# Altium PCB PCB2.PcbDoc
Units mil, origin at the board's own origin, x right, y up, seen from the top; angles counter-clockwise.
Board outline 6000 x 4000 mil, 2 copper layers (Top Layer, Bottom Layer), stack 12.8 mil thick; 9 components, 15 nets, 60 pads, 0 vias.
Unrouted connection lines stored in the file: 1.
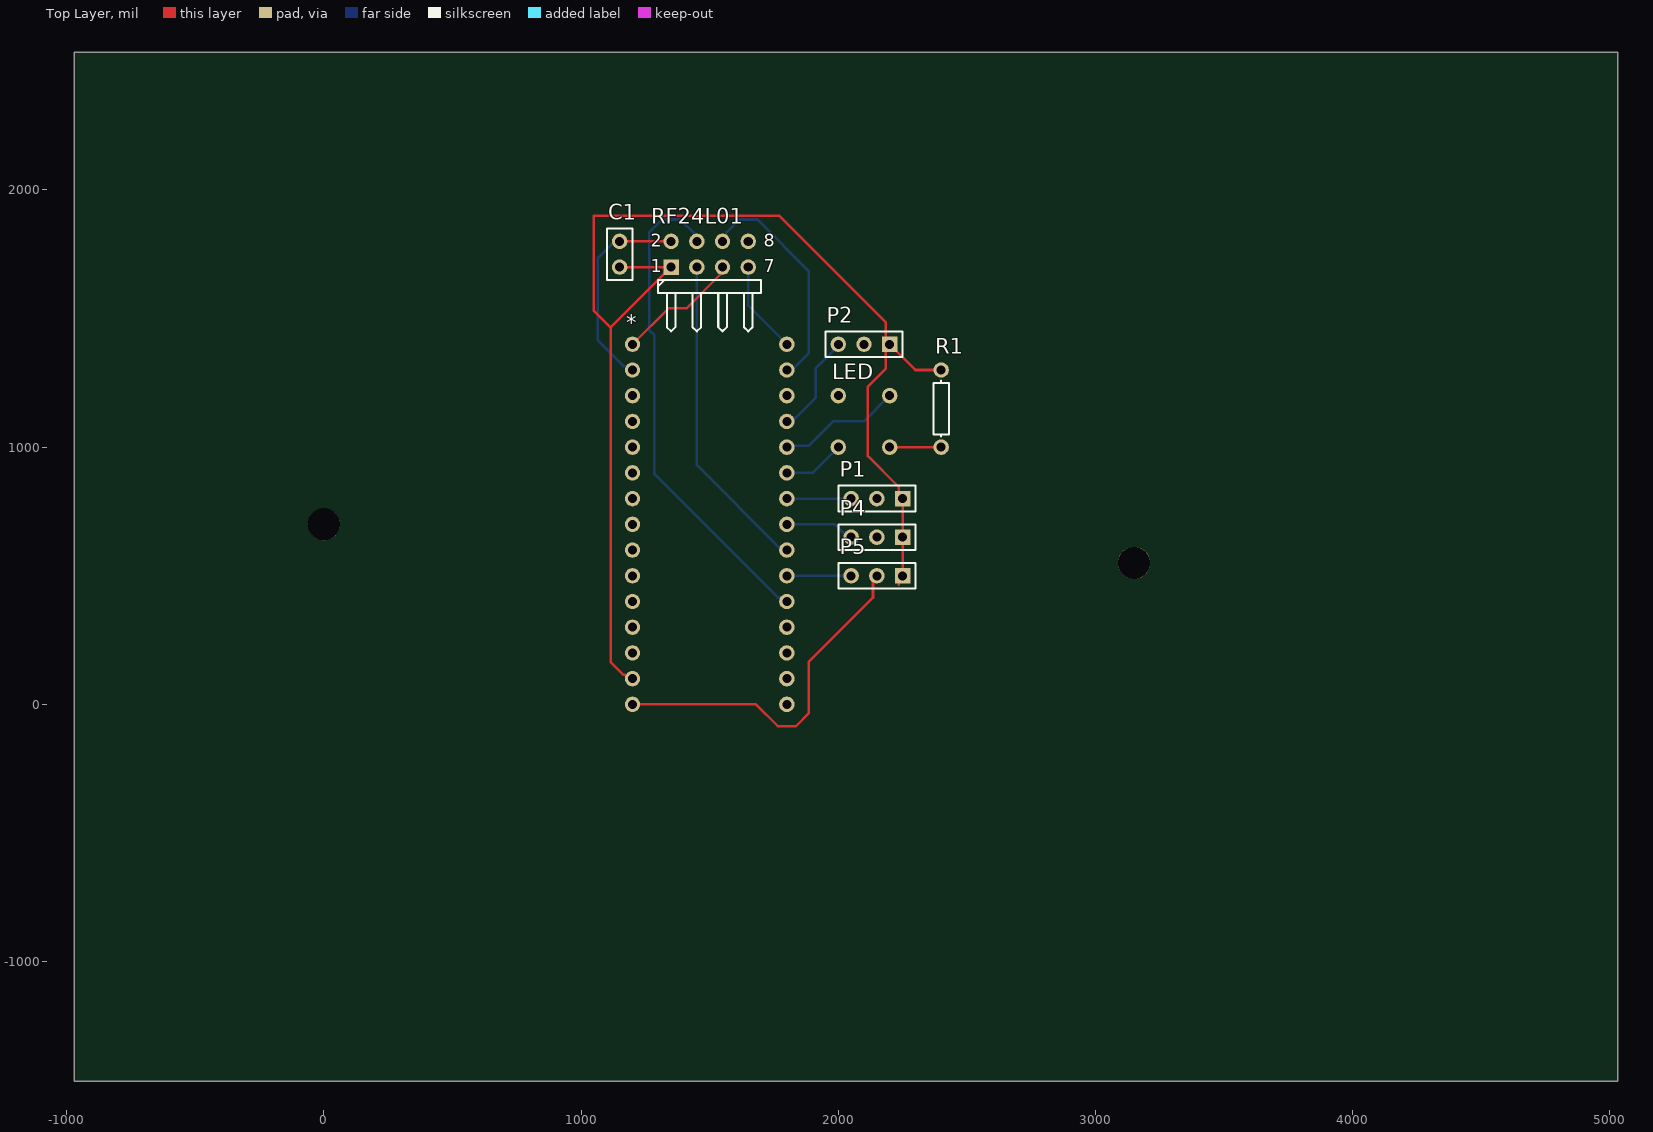
[diagram p0: Top Layer view]
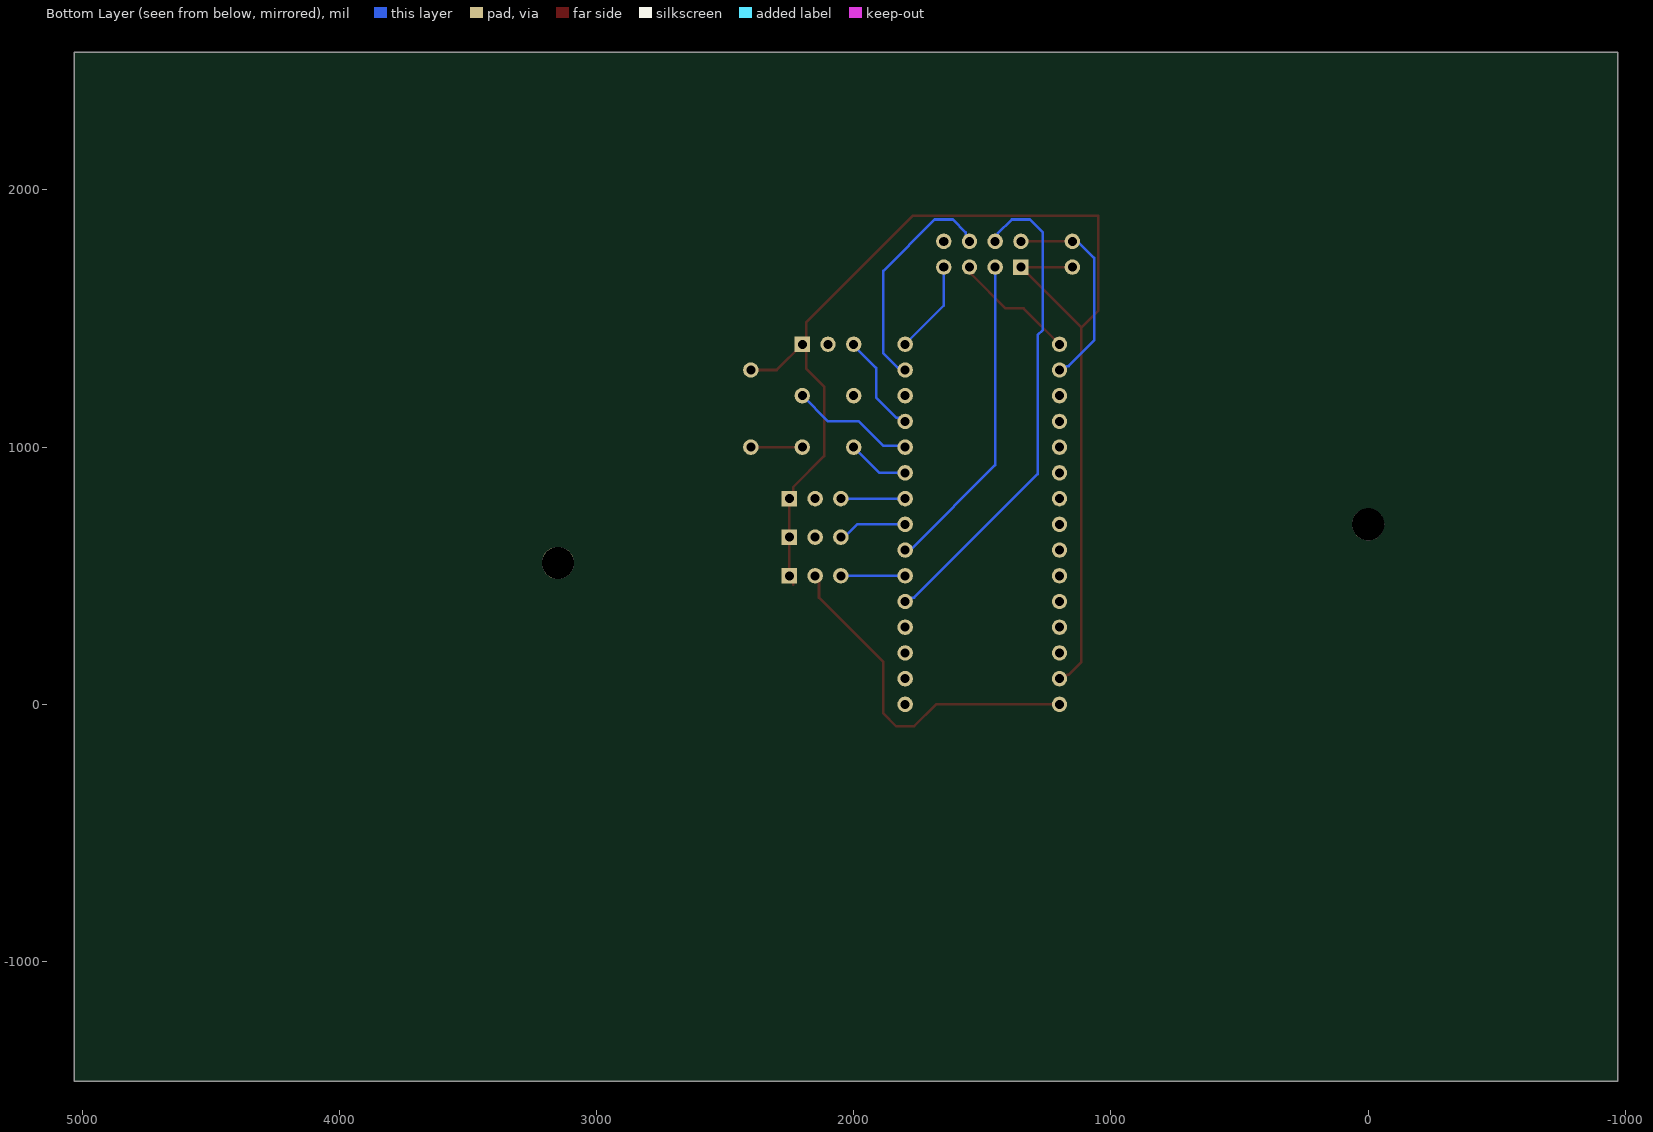
[diagram p1: Bottom Layer view, seen from below]

## Layer stack, top to bottom
Top Layer: signal copper 1.4
Dielectric 1: core 10, FR-1, Dk 4.2
Bottom Layer: signal copper 1.4

## Board outline
-970,-1465 5030,-1465 5030,2535 -970,2535

## Design rules (kind name [scope] priority, off if disabled: settings)
Clearance [All] p1: gap=10 ignorepadtopadclearanceinfootprint=TRUE except(0: Arc-Text Track-Text SMDPad-Text SMDPad-Hole THPad-Text THPad-Hole Via-Text Via-Hole Fill-Text Fill-Hole Poly-Text Poly-Hole Region-Text Region-Hole Text-Text Text-Hole; 50: Arc-Arc Arc-Track Arc-SMDPad Arc-THPad Arc-Via Arc-Fill Arc-Poly Arc-Region Arc-Hole Track-Track Track-SMDPad Track-THPad Track-Via Track-Fill Track-Poly Track-Region Track-Hole)
MinimumAnnularRing [All] p1: minimumring=10
PolygonConnect [All] p1: connectstyle=Relief reliefconductorwidth=10 reliefentries=4 polygonreliefangle="90 Angle" airgapwidth=10
RoomDefinition Sheet1 [InComponentClass('Sheet1')] p1: confinementstyle=ConfineIn formatcopy=TRUE lockcomponents=FALSE outline -1970,-2465 30,-2465 30,-1465 -1970,-1465
RoutingVias [All] p1: holewidth=28 width=50 viastyle="Through Hole" minholewidth=28 minwidth=50 maxholewidth=28 maxwidth=50
ShortCircuit ShortCircuit_1 [OnLayer('Top Overlay')] p1: allowed=FALSE
ShortCircuit [All] p2: allowed=FALSE
SolderMaskExpansion [All] p1: expansion=4
Width [All] p1: maxlimit=10 minlimit=10 preferedwidth=10
29 further rules are at their usual default settings.

## Components (designator, comment, footprint, x,y, rotation, side; value= is the part's Value field where it differs from the comment)
* "Component_1" PCBComponent_1 1200,1400 r0 top
C1 "Cap" RAD-0.1 1150,1750 r90 top value="10 uf"
LED "Component_1" LED 2200,1200 r180 top
P1 "M4" HDR1X3 2250,800 r180 top
P2 "M1" HDR1X3 2200,1400 r180 top
P4 "M3" HDR1X3 2250,650 r180 top
P5 "M2" HDR1X3 2250,500 r180 top
R1 "Res1" AXIAL-0.3 2400,1150 r90 top value=1K
RF24L01 "Header 4X2H" HDR2X4H 1350,1700 r0 top

## Footprints (in the part's own frame and the unit in brackets; to place one, negate y for a bottom-side part, rotate by r counter-clockwise, add the part's x,y. Pads: shape width x height; smd on the part's side, far side on the other; paste and mask are expansions set on the pad)
AXIAL-0.3 [mil] "Axial Device, Thru-Hole; 2 Leads; 0.3 in Pin Spacing"
  round 60 hole 35: 1(-150,0) 2(150,0)
  silkscreen extent -109,-30 109,30
HDR1X3 [mil] "Connector; Header; 3 Position"
  rect 60x60 hole 35: 1(0,0)
  round 60 hole 35: 2(100,0) 3(200,0)
  silkscreen extent -50,-50 250,50
HDR2X4H [mil] "Connector; Header; 4x2 Position; Right Angle"
  rect 60x60 hole 35: 1(0,0)
  round 60 hole 35: 2(0,100) 3(100,0) 4(100,100) 5(200,0) 6(200,100) 7(300,0) 8(300,100)
  silkscreen extent -50,-250 350,-50
LED [mil]
  round 60 hole 35: 1(0,0) 2(200,0) 3(200,200) 4(0,200)
PCBComponent_1 [mil]
  round 60 hole 35: 1(0,0) 2(0,-100) 3(0,-200) 4(0,-300) 5(0,-400) 6(0,-500) 7(0,-600) 8(0,-700) 9(0,-800) 10(0,-900) 11(0,-1000) 12(0,-1100) 13(0,-1200) 14(0,-1300) 15(0,-1400) 16(600,0) 17(600,-100) 18(600,-200) 19(600,-300) 20(600,-400) 21(600,-500) 22(600,-600) 23(600,-700) 24(600,-800) 25(600,-900) 26(600,-1000) 27(600,-1100) 28(600,-1200) 29(600,-1300) 30(600,-1400)
RAD-0.1 [mil] "Radial Cap, Thru-Hole; 2 Leads; 0.1 in Pin Spacing"
  round 60 hole 35: 1(-50,0) 2(50,0)
  silkscreen extent -100,-50 100,50

## Part data
C1: "Capacitor", LatestRevisionDate=17-Jul-2002, LatestRevisionNote="Re-released for DXP Platform.", PackageDescription="Radial Cap, Thru-Hole; 2 Leads; 0.3 in Pin Spacing", PackageReference=RAD-0.3, Published=8-Jun-2000, Publisher="Altium Limited"
P1 P2 P4 P5: library part "Header 3", "Header, 3-Pin", LatestRevisionDate=17-Jul-2002, LatestRevisionNote="Re-released for DXP Platform.", Publisher="Altium Limited"
R1: "Resistor", LatestRevisionDate=17-Jul-2002, LatestRevisionNote="Re-released for DXP Platform.", PackageDescription="Axial Device, Thru-Hole; 2 Leads; 0.3 in Pin Spacing", PackageReference=AXIAL-0.3, Published=8-Jun-2000, Publisher="Altium Limited"
RF24L01: "Header, 4-Pin, Dual row, Right Angle", LatestRevisionDate=17-Jul-2002, LatestRevisionNote="Re-released for DXP Platform.", Publisher="Altium Limited"

## Free pads (board coordinates)
  round 125 hole 125 unplated: 52(0,700) 53(3150,550)

## Nets (pads, with @x,y where several pads share a name; then routed paths per layer and width w, separated by ;. In a path a pad name is that pad's centre, name@x,y a point inside that pad or via, vN(x,y) a via of type N, cw(c..) or ccw(c..) an arc to the next point about the centre after c; other vN are vias at no path point)
GND: *.14 *.27 C1.1 P1.1 P2.1 P4.1 P5.1 R1.2 RF24L01.1 | length 5078.4
  Top Layer w10: C1.1 RF24L01.1 1115,1465 ; *.14 1186.47,100 1171.47,115 1164.79,115 1115,164.79 1115,1465 ; 2235,464.79 2235,485 P5.1 P4.1 P1.1 2235,815 2235,844.79 2115,964.79 2115,1235.21 2185,1305.21 2185,1385 P2.1 ; R1.2 2300,1300 P2.1 ; 1115,1465 1050,1530 1050,1900 1770,1900 2185,1485 2185,1415 P2.1
Net*_1: *.1 RF24L01.5 | length 486.1
  Top Layer w10: *.1 1339.9,1539.9 1410.1,1539.9 1540.43,1670.22 1540.43,1690.43 RF24L01.5
Net*_2: *.2 C1.2 RF24L01.2 | length 814.8
  Top Layer w10: C1.2 RF24L01.2
  Bottom Layer w10: C1.2 1129.79,1800 1065,1735.21 1065,1414.79 1164.79,1315 1171.47,1315 1186.47,1300 *.2
Net*_15: *.15 P5.2 | length 1385.8
  Top Layer w10: *.15 1679.79,0 1764.79,-85 1835.21,-85 1885,-35.21 1885,165 2135,415 2135,485 P5.2
Net*_16: *.16 RF24L01.7 | length 362.1
  Bottom Layer w10: RF24L01.7 1650,1550 *.16
Net*_17: *.17 RF24L01.6 | length 897.1
  Bottom Layer w10: RF24L01.6 1550,1813.53 1565,1828.53 1565,1835.21 1614.79,1885 1685.21,1885 1885,1685.21 1885,1364.79 1829.78,1309.57 1809.57,1309.57 *.17
Net*_19: *.19 P2.3 | length 394.7
  Bottom Layer w10: *.19 1813.53,1100 1828.53,1115 1835.21,1115 1912.82,1192.61 1912.82,1307.76 2000,1394.94 P2.3
Net*_20: *.20 LED.1 | length 482.8
  Bottom Layer w10: *.20 1805.21,1005.21 1885,1005.21 1979.79,1100 2100,1100 LED.1
Net*_21: *.21 LED.3 | length 241.4
  Bottom Layer w10: *.21 1900,900 LED.3
Net*_22: *.22 P1.3 | length 250
  Bottom Layer w10: *.22 P1.3
Net*_23: *.23 P4.3 | length 270.7
  Bottom Layer w10: *.23 1986.47,700 2036.47,650 P4.3
Net*_24: *.24 RF24L01.3 | length 1256.8
  Bottom Layer w10: RF24L01.3 1450,929.79 1770.22,609.57 1790.43,609.57 *.24
Net*_25: *.25 P5.3 | length 250
  Bottom Layer w10: *.25 P5.3
Net*_26: *.26 RF24L01.4 | length 1921.3
  Bottom Layer w10: RF24L01.4 1440.43,1809.57 1440.43,1829.78 1385.21,1885 1314.79,1885 1265,1835.21 1265,1455.21 1285,1435.21 1285,894.79 1764.79,415 1771.47,415 1786.47,400 *.26
NetLED_4: LED.4 R1.1 | length 200
  Top Layer w10: LED.4 R1.1
pads on no net: *.3 *.4 *.5 *.6 *.7 *.8 *.9 *.10 *.11 *.12 *.13 *.18 *.28 *.29 *.30 LED.2 P1.2 P2.2 P4.2 RF24L01.8

## Text inside footprints (layer, text, board x,y; h text height)
RF24L01: Top Overlay "2" at 1270,1780 h50; Top Overlay "1" at 1270,1680 h50; Top Overlay "7" at 1710,1680 h50; Top Overlay "8" at 1710,1780 h50